# EAGLE board commutator (EAGLE 7.2.0)
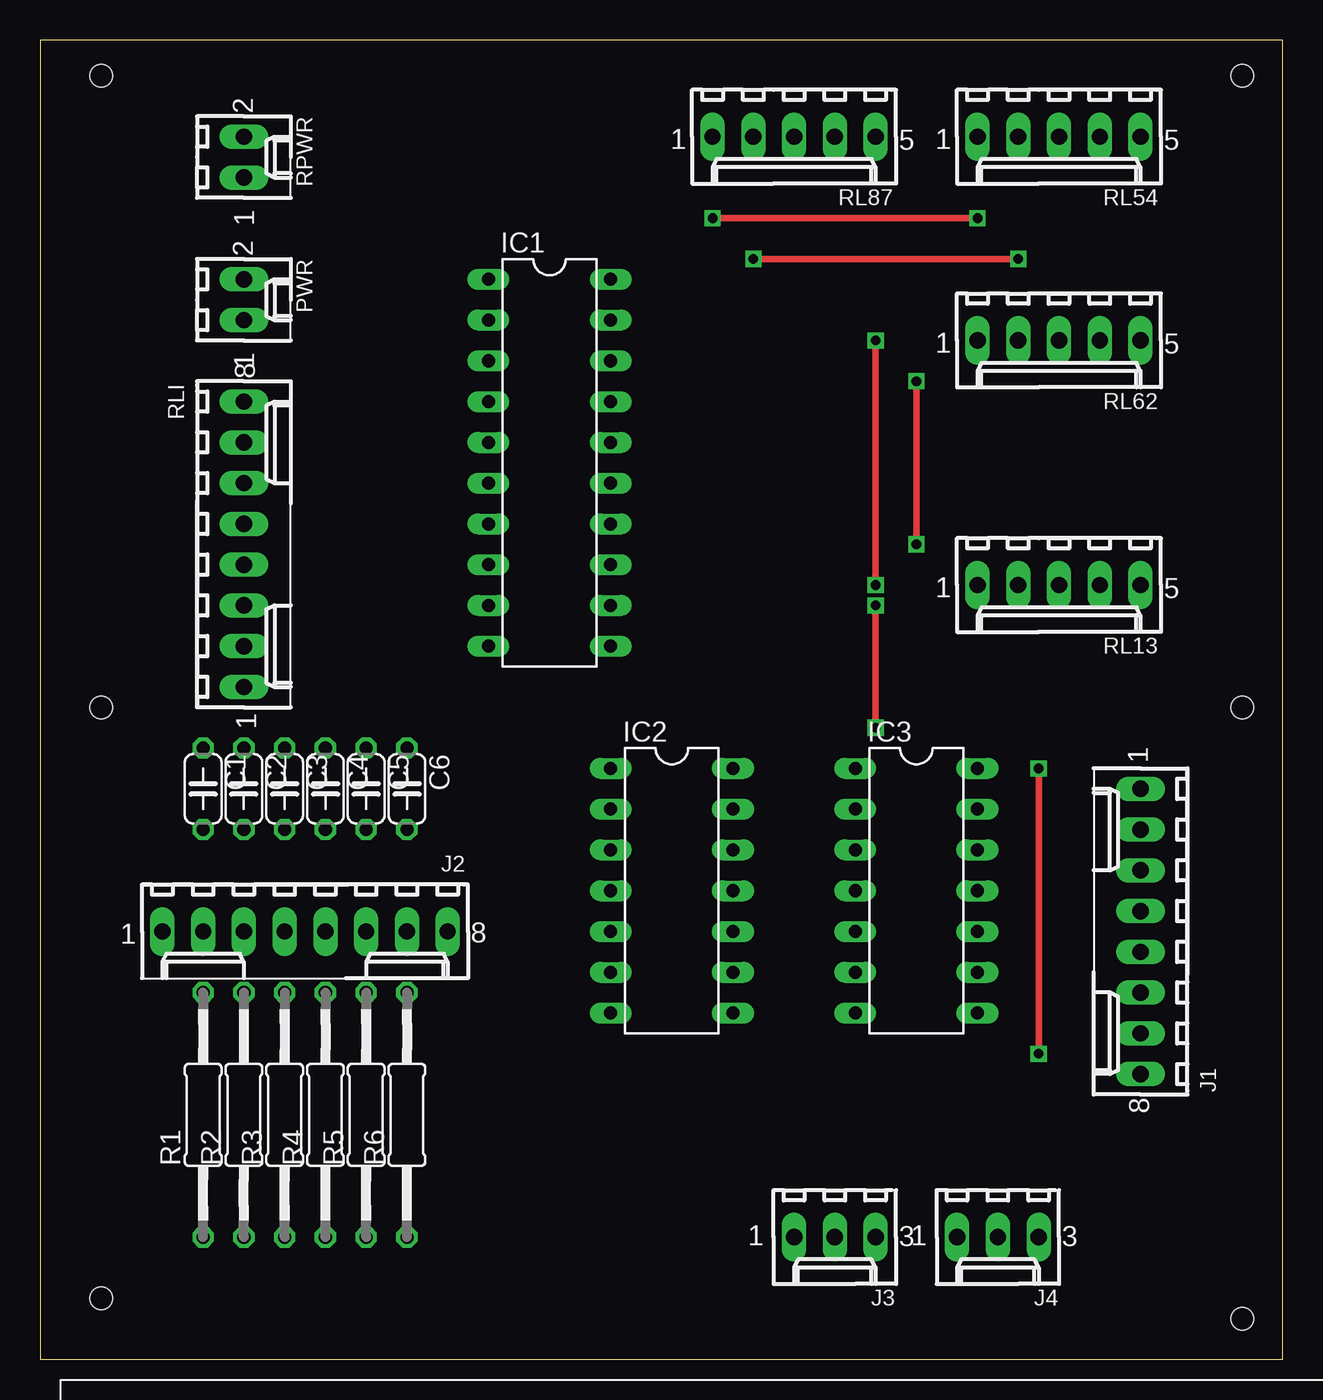
[diagram p0: board, top side]
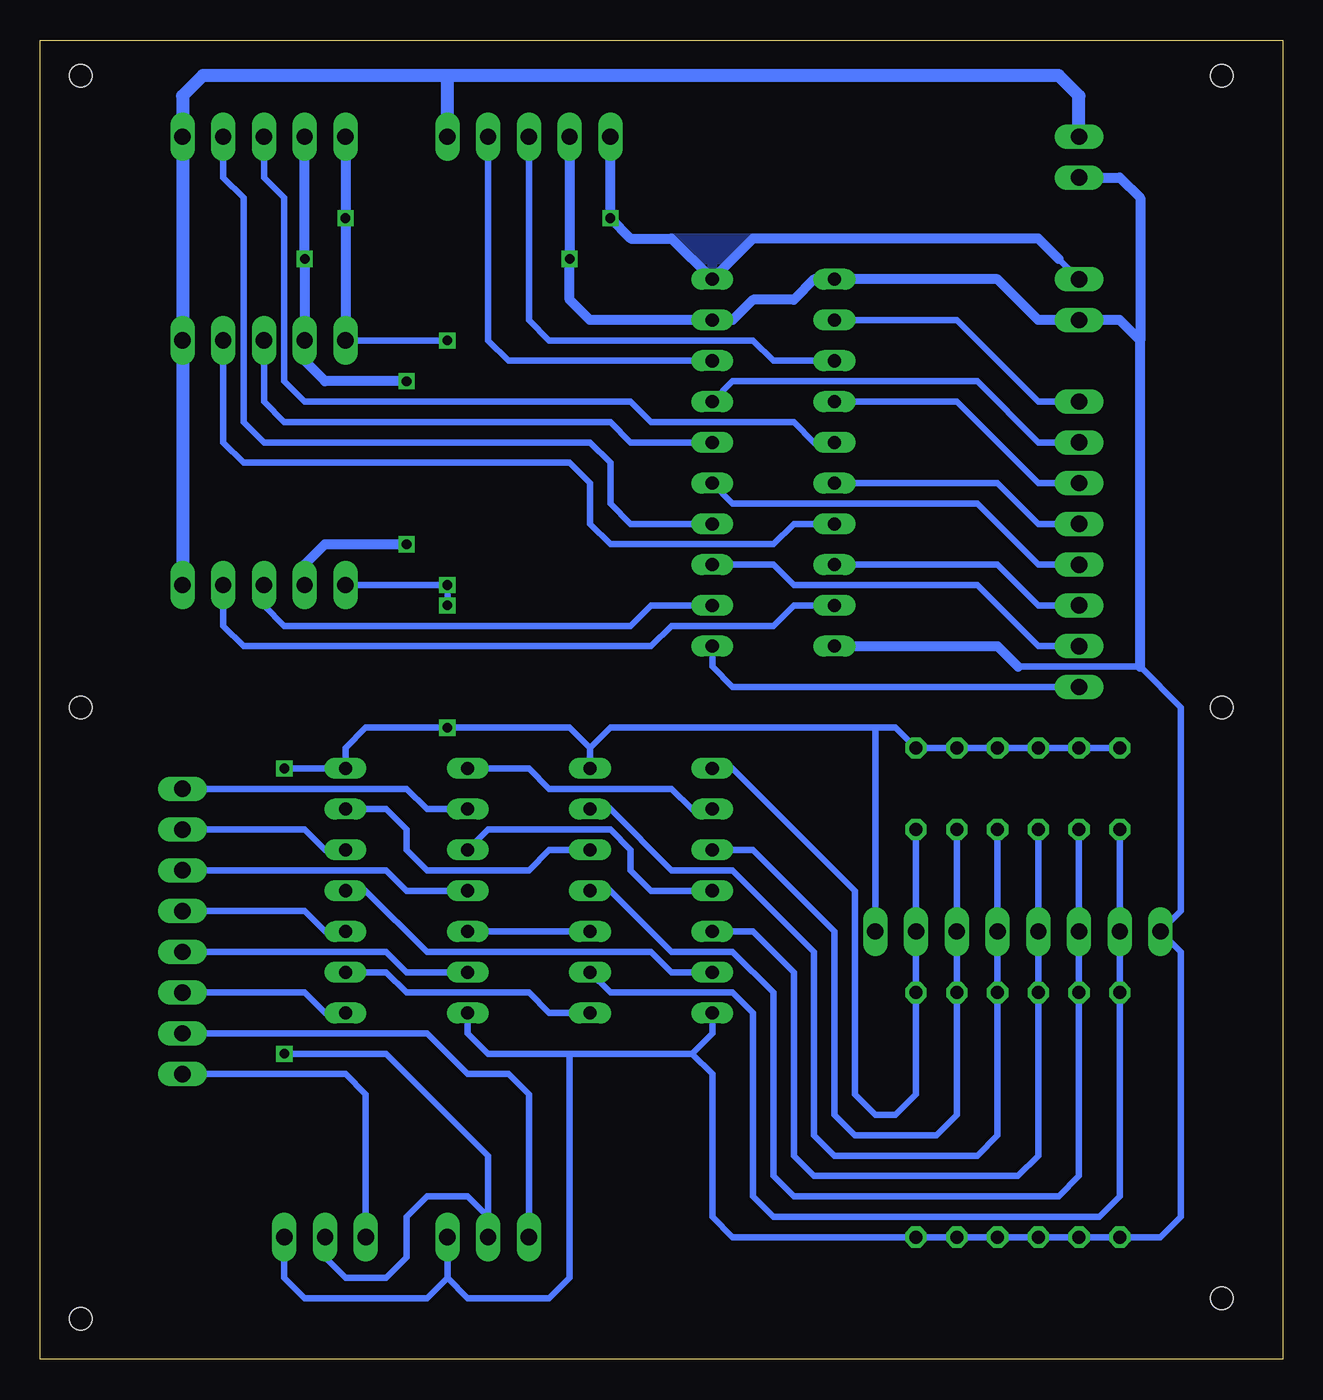
[diagram p1: board, bottom side, seen from below]

Size 77.45 x 82.22 mm. Coordinates in mm from the lower left corner, seen from the top.
Outline: 0,0 77.45,0 77.45,82.22 0,82.22 0,0
Copper layers (1*16): Top 0.035mm / dielectric 1.5mm / Bottom 0.035mm
Design rules "default": minimum track width 10mil, minimum drill 24mil, track to track 8mil, track to pad 8mil, pad to pad 8mil, via to via 8mil, smd to smd 8mil, copper to edge 40mil, drill to drill 8mil, minimum pad ring 10mil, minimum via ring 8mil, stop-mask expansion 4mil, vias tented up to drill 0mil, thermal gap 10mil
Net classes: 1 VCC/2: width 1.143 mm
Holes 1.4 mm at 3.81,80.01 74.93,80.01 3.81,40.64 74.93,40.64 3.81,3.81 74.93,2.54

## Footprints (pad centres in the part's own frame; a part is rotated, then mirrored left to right if it is on the bottom)
C050-024X044 = drill 0.813 octagon: 1 -2.54,0; 2 2.54,0
DIL20 = drill 0.813 long: 1 -11.43,-3.81; 2 -8.89,-3.81; 3 -6.35,-3.81; 4 -3.81,-3.81; 5 -1.27,-3.81; 6 1.27,-3.81; 7 3.81,-3.81; 8 6.35,-3.81; 9 8.89,-3.81; 10 11.43,-3.81; 11 11.43,3.81; 12 8.89,3.81; 13 6.35,3.81; 14 3.81,3.81; 15 1.27,3.81; 16 -1.27,3.81; 17 -3.81,3.81; 18 -6.35,3.81; 19 -8.89,3.81; 20 -11.43,3.81
DIL14 = drill 0.813 long: 1 -7.62,-3.81; 2 -5.08,-3.81; 3 -2.54,-3.81; 4 0,-3.81; 5 2.54,-3.81; 6 5.08,-3.81; 7 7.62,-3.81; 8 7.62,3.81; 9 5.08,3.81; 10 2.54,3.81; 11 0,3.81; 12 -2.54,3.81; 13 -5.08,3.81; 14 -7.62,3.81
6410-08 = drill 1.016 long: 1 8.89,0; 2 6.35,0; 3 3.81,0; 4 1.27,0; 5 -1.27,0; 6 -3.81,0; 7 -6.35,0; 8 -8.89,0
6410-03 = drill 1.016 long: 1 2.54,0; 2 0,0; 3 -2.54,0
6410-05 = drill 1.016 long: 1 5.08,0; 2 2.54,0; 3 0,0; 4 -2.54,0; 5 -5.08,0
6410-02 = drill 1.016 long: 1 1.27,0; 2 -1.27,0
0207/15 = drill 0.813 octagon: 1 -7.62,0; 2 7.62,0
2X7SEG = drill 0.8 square: CLK -35.56,-5.08; CLK2 33.02,-5.08; CS -35.56,-2.54; DIN -35.56,0; DOUT 33.02,0; GND -35.56,2.54; GND2 33.02,2.54; LOAD 33.02,-2.54; VCC -35.56,5.08; VCC2 33.02,5.08

## Placement (x,y rotation side)
C1  [C050-024X044]  10.16,35.56 270 top
C2  [C050-024X044]  12.7,35.56 270 top
C3  [C050-024X044]  15.24,35.56 270 top
C4  [C050-024X044]  17.78,35.56 270 top
C5  [C050-024X044]  20.32,35.56 270 top
C6  [C050-024X044]  22.86,35.56 270 top
IC1  74HC244N  [DIL20]  31.75,55.88 270 top
IC2  74HC14N  [DIL14]  39.37,29.21 270 top
IC3  74HC04N  [DIL14]  54.61,29.21 270 top
J1  22-27-2081-08  [6410-08]  68.58,26.67 90 top
J2  22-27-2081-08  [6410-08]  16.51,26.67 180 top
J3  22-27-2031-03  [6410-03]  49.53,7.62 180 top
J4  22-27-2031-03  [6410-03]  59.69,7.62 180 top
J5  22-27-2051-05  [6410-05]  8.89,-54.61 0 top  (outside the outline)
PWR  22-27-2021-02  [6410-02]  12.7,66.04 270 top
R1  [0207/15]  10.16,15.24 90 top
R2  [0207/15]  12.7,15.24 90 top
R3  [0207/15]  15.24,15.24 90 top
R4  [0207/15]  17.78,15.24 90 top
R5  [0207/15]  20.32,15.24 90 top
R6  [0207/15]  22.86,15.24 90 top
RL13  22-27-2051-05  [6410-05]  63.5,48.26 180 top
RL54  22-27-2051-05  [6410-05]  63.5,76.2 180 top
RL62  22-27-2051-05  [6410-05]  63.5,63.5 180 top
RL87  22-27-2051-05  [6410-05]  46.99,76.2 180 top
RLI  22-27-2081-08  [6410-08]  12.7,50.8 270 top
RPWR  22-27-2021-02  [6410-02]  12.7,74.93 270 top
U$1  2X7SEG  [2X7SEG]  44.45,-8.89 0 top  (outside the outline)
U$2  2X7SEG  [2X7SEG]  44.45,-25.4 0 top  (outside the outline)
U$3  2X7SEG  [2X7SEG]  44.45,-41.91 0 top  (outside the outline)

## Library data of the parts
C1-C6 R1-R6 = rcl
IC1-IC3 = 74xx-eu
J1-J5 PWR RL13 RL54 RL62 RL87 RLI RPWR = con-molex; OC_FARNELL: unknown; OC_NEWARK: unknown
U$1-U$3 = arduino

## Nets
GND: IC1.1 IC1.10 IC1.19 IC2.7 IC3.7 J2.1 J3.3 J4.3 PWR.1 R1.1 R2.1 R3.1 R4.1 R5.1 R6.1 RL13.2 RL54.2 RL62.2 RL87.2 RPWR.1
N$1: IC2.12 IC3.13
N$2: IC2.10 IC3.5
N$3: IC2.8 IC3.9
N$4: IC2.2 IC3.1
N$5: IC2.4 IC3.3
N$6: IC2.6 IC3.11
N$7: IC3.2 J1.1
N$8: IC3.12 J1.2
N$9: IC3.4 J1.3
N$10: IC3.10 J1.4
N$11: IC3.6 J1.5
N$12: IC3.8 J1.6
N$13: C1.2 IC2.9 J2.2 R1.2
N$14: C2.2 IC2.11 J2.3 R2.2
N$15: C3.2 IC2.5 J2.4 R3.2
N$16: C4.2 IC2.13 J2.5 R4.2
N$17: C5.2 IC2.3 J2.6 R5.2
N$18: C6.2 IC2.1 J2.7 R6.2
N$20: J1.7 J3.1
N$21: J1.8 J4.1
N$22: U$1.DOUT U$2.DIN
N$23: U$1.LOAD U$2.CS
N$24: J5.1 U$1.CLK U$1.CLK2 U$2.CLK U$2.CLK2 U$3.CLK U$3.CLK2
N$25: U$2.DOUT U$3.DIN
N$26: U$2.LOAD U$3.CS
N$27: J5.5 U$1.VCC U$1.VCC2 U$2.VCC U$2.VCC2 U$3.VCC U$3.VCC2
N$28: J5.4 U$1.GND U$1.GND2 U$2.GND U$2.GND2 U$3.GND U$3.GND2
N$29: J5.3 U$1.DIN
N$30: J5.2 U$1.CS
REL1: IC1.9 RL13.4
REL2: IC1.7 RL62.4
REL3: IC1.12 RL13.3
REL4: IC1.5 RL54.3
REL5: IC1.14 RL54.4
REL6: IC1.16 RL62.3
REL7: IC1.3 RL87.3
REL8: IC1.18 RL87.4
RL1: IC1.11 RLI.1
RL2: IC1.13 RLI.2
RL3: IC1.8 RLI.3
RL4: IC1.15 RLI.4
RL5: IC1.6 RLI.5
RL6: IC1.4 RLI.6
RL7: IC1.17 RLI.7
RL8: IC1.2 RLI.8
VCC: C1.1 C2.1 C3.1 C4.1 C5.1 C6.1 IC1.20 IC2.14 IC3.14 J2.8 J3.2 J4.2 PWR.2 RL13.1 RL54.1 RL62.1 RL87.1
VCC/2 [VCC/2]: RL13.5 RL54.5 RL62.5 RL87.5 RPWR.2

## Tracks (layer width: path | path; a pad name or v marks a point on that pad's centre or on a via)
GND  (via drill 0.6)
  Top 0.406: v44.45,68.58 v60.96,68.58 | v54.61,50.8 v54.61,60.96
  Bottom 0.406: 16.51,43.18 8.89,43.18 6.35,40.64 6.35,27.94 J2.1 6.35,25.4 6.35,8.89 7.62,7.62 R1.1 R2.1 R3.1 R4.1 R5.1 R6.1 34.29,7.62 35.56,8.89 35.56,17.78 36.83,19.05 | RL13.2 60.96,49.53 | IC2.7 35.56,20.32 36.83,19.05 | 36.83,19.05 44.45,19.05 | 44.45,19.05 49.53,19.05 50.8,20.32 IC3.7 | J4.3 62.23,5.08 60.96,3.81 53.34,3.81 52.07,5.08 | J3.3 52.07,5.08 | 52.07,5.08 50.8,3.81 45.72,3.81 44.45,5.08 44.45,19.05
  Bottom 0.61: IC1.10 17.78,44.45 16.51,43.18 | 8.89,43.18 8.89,63.5 | 8.89,63.5 10.16,64.77 PWR.1 15.24,64.77 17.78,67.31 IC1.1 29.21,67.31 30.48,66.04 33.02,66.04 34.29,64.77 IC1.19 43.18,64.77 44.45,66.04 v44.45,68.58 RL87.2 | RPWR.1 10.16,73.66 8.89,72.39 8.89,63.5 | RL54.2 v60.96,68.58 RL62.2 60.96,62.23 59.69,60.96 v54.61,60.96 | 60.96,49.53 59.69,50.8 v54.61,50.8
N$1
  Bottom 0.406: IC2.12 45.72,31.75 46.99,30.48 53.34,30.48 54.61,31.75 54.61,33.02 55.88,34.29 IC3.13
N$2
  Bottom 0.406: IC2.10 IC3.5
N$3
  Bottom 0.406: IC2.8 45.72,21.59 46.99,22.86 54.61,22.86 55.88,24.13 IC3.9
N$4
  Bottom 0.406: IC2.2 36.83,34.29 38.1,35.56 45.72,35.56 46.99,36.83 IC3.1
N$5
  Bottom 0.406: IC2.4 39.37,29.21 40.64,30.48 40.64,31.75 41.91,33.02 49.53,33.02 IC3.3
N$6
  Bottom 0.406: IC2.6 38.1,24.13 39.37,25.4 53.34,25.4 57.15,29.21 IC3.11
N$7
  Bottom 0.406: J1.1 54.61,35.56 53.34,34.29 IC3.2
N$8
  Bottom 0.406: IC3.12 59.69,31.75 60.96,33.02 J1.2
N$9
  Bottom 0.406: IC3.4 54.61,29.21 55.88,30.48 J1.3
N$10
  Bottom 0.406: IC3.10 59.69,26.67 60.96,27.94 J1.4
N$11
  Bottom 0.406: IC3.6 54.61,24.13 55.88,25.4 J1.5
N$12
  Bottom 0.406: IC3.8 59.69,21.59 60.96,22.86 J1.6
N$13
  Bottom 0.406: C1.2 J2.2 R1.2 10.16,10.16 11.43,8.89 31.75,8.89 33.02,10.16 33.02,21.59 34.29,22.86 41.91,22.86 IC2.9
N$14
  Bottom 0.406: C2.2 J2.3 R2.2 12.7,11.43 13.97,10.16 30.48,10.16 31.75,11.43 31.75,22.86 34.29,25.4 38.1,25.4 41.91,29.21 IC2.11
N$15
  Bottom 0.406: C3.2 J2.4 R3.2 15.24,12.7 16.51,11.43 29.21,11.43 30.48,12.7 30.48,24.13 33.02,26.67 IC2.5
N$16
  Bottom 0.406: C4.2 J2.5 R4.2 17.78,13.97 19.05,12.7 27.94,12.7 29.21,13.97 29.21,25.4 34.29,30.48 38.1,30.48 41.91,34.29 IC2.13
N$17
  Bottom 0.406: C5.2 J2.6 R5.2 20.32,15.24 21.59,13.97 26.67,13.97 27.94,15.24 27.94,26.67 33.02,31.75 IC2.3
N$18
  Bottom 0.406: C6.2 J2.7 R6.2 22.86,16.51 24.13,15.24 25.4,15.24 26.67,16.51 26.67,29.21 34.29,36.83 IC2.1
N$20
  Bottom 0.406: J1.7 53.34,20.32 50.8,17.78 48.26,17.78 46.99,16.51 J3.1
N$21
  Bottom 0.406: J1.8 58.42,17.78 57.15,16.51 J4.1
N$22  (1 unrouted)
N$23  (1 unrouted)
N$24  (6 unrouted)
N$25  (1 unrouted)
N$26  (1 unrouted)
N$27  (6 unrouted)
N$28  (6 unrouted)
N$29  (1 unrouted)
N$30  (1 unrouted)
REL1
  Bottom 0.406: IC1.9 30.48,46.99 31.75,45.72 38.1,45.72 39.37,44.45 64.77,44.45 66.04,45.72 RL13.4
REL2
  Bottom 0.406: IC1.7 30.48,52.07 31.75,50.8 41.91,50.8 43.18,52.07 43.18,54.61 44.45,55.88 64.77,55.88 66.04,57.15 RL62.4
REL3
  Bottom 0.406: IC1.12 39.37,46.99 40.64,45.72 62.23,45.72 63.5,46.99 RL13.3
REL4
  Bottom 0.406: IC1.5 29.21,57.15 30.48,58.42 39.37,58.42 40.64,59.69 60.96,59.69 62.23,60.96 62.23,72.39 63.5,73.66 RL54.3
REL5
  Bottom 0.406: IC1.14 40.64,52.07 41.91,53.34 41.91,55.88 43.18,57.15 63.5,57.15 64.77,58.42 64.77,72.39 66.04,73.66 RL54.4
REL6
  Bottom 0.406: IC1.16 40.64,57.15 41.91,58.42 62.23,58.42 63.5,59.69 RL62.3
REL7
  Bottom 0.406: IC1.3 31.75,62.23 33.02,63.5 45.72,63.5 46.99,64.77 RL87.3
REL8
  Bottom 0.406: IC1.18 48.26,62.23 49.53,63.5 RL87.4
RL1
  Bottom 0.406: RLI.1 34.29,41.91 35.56,43.18 IC1.11
RL2
  Bottom 0.406: IC1.13 31.75,49.53 30.48,48.26 19.05,48.26 15.24,44.45 RLI.2
RL3
  Bottom 0.406: RLI.3 15.24,46.99 17.78,49.53 IC1.8
RL4
  Bottom 0.406: RLI.4 15.24,49.53 19.05,53.34 34.29,53.34 IC1.15
RL5
  Bottom 0.406: RLI.5 15.24,52.07 17.78,54.61 IC1.6
RL6
  Bottom 0.406: RLI.6 15.24,54.61 20.32,59.69 IC1.4
RL7
  Bottom 0.406: RLI.7 15.24,57.15 19.05,60.96 34.29,60.96 IC1.17
RL8
  Bottom 0.406: RLI.8 15.24,59.69 20.32,64.77 IC1.2
VCC  (via drill 0.6)
  Top 0.406: v58.42,71.12 v41.91,71.12 | v52.07,48.26 v52.07,63.5 | v52.07,39.37 v52.07,46.99 | v62.23,19.05 v62.23,36.83
  Bottom 0.406: PWR.2 13.97,68.58 | 34.29,68.58 IC1.20 | C1.1 C2.1 C3.1 C4.1 C5.1 C6.1 24.13,39.37 25.4,39.37 | 25.4,39.37 41.91,39.37 43.18,38.1 | 43.18,38.1 IC2.14 | 43.18,38.1 44.45,39.37 v52.07,39.37 57.15,39.37 58.42,38.1 IC3.14 v62.23,36.83 | RL13.1 v52.07,48.26 v52.07,46.99 | v52.07,63.5 RL62.1 | J2.8 25.4,39.37 | J4.2 59.69,6.35 58.42,5.08 55.88,5.08 54.61,6.35 54.61,8.89 53.34,10.16 50.8,10.16 49.53,8.89 J3.2 49.53,12.7 55.88,19.05 v62.23,19.05
  Bottom 0.61: RL62.1 v58.42,71.12 RL54.1 | RL87.1 v41.91,71.12 40.64,69.85 38.1,69.85 IC1.20 33.02,69.85 15.24,69.85 13.97,68.58
  pour Bottom: 33.02,69.85 38.1,69.85 35.56,67.31
VCC/2
  Bottom 0.813: RPWR.2 12.7,78.74 13.97,80.01 52.07,80.01 | 52.07,80.01 67.31,80.01 68.58,78.74 RL54.5 RL62.5 RL13.5 | RL87.5 52.07,80.01